# EAGLE board SparkFun_Dev_ESP32_C3_MINI (EAGLE 9.6.2)

Size 17.78 x 33.02 mm. Coordinates in mm from the lower left corner, seen from the top.
Outline: 0,33.02 0,0 17.78,0 17.78,33.02 0,33.02
Copper layers (1+2*15+16): Top 0.035559375mm / dielectric 0.47751875mm / Route2 0.035559375mm / dielectric 0.47751875mm / Route15 0.035559375mm / dielectric 0.47751875mm / Bottom 0.035559375mm
Design rules "SparkFun-4-Layer-General-JLCPCB": minimum track width 7mil, minimum drill 12mil, track to track 7mil, track to pad 7mil, pad to pad 7mil, via to via 7mil, smd to smd 7mil, copper to edge 7mil, drill to drill 7mil, minimum pad ring 7mil, minimum via ring 7mil, stop-mask expansion 3mil, vias tented up to drill 25mil, thermal gap 10mil
Net classes: 1 Power: width 0.127 mm, clearance 0.178 mm
tRestrict: area 17.8,19.6 to 18,19.8
bRestrict: area 8.1,8.1 to 8.4,8.4

## Footprints (pad centres in the part's own frame; a part is rotated, then mirrored left to right if it is on the bottom)
TACTILE_SWITCH_SMD_4.6X2.8MM = smd 0.9 x 1: 1 -2.05,-0.8; 2 2.05,-0.8; 3 2.05,0.8; 4 -2.05,0.8
0402-TIGHT = smd 0.6 x 0.6: 1 -0.5,0; 2 0.5,0
LED-0603 = smd 1 x 1: A -0.877,0; C 0.877,0
FIDUCIAL-MICRO = smd 0.635 x 0.635: 1 0,0
SMT-JUMPER_3_2-NC_TRACE_SILK = smd 0.66 x 1.27: 1 -1.041,0; 2 0,0; 3 1.041,0
USB-C-16P_4LAYER-PADS = smd 0.3 x 1: A5 -1.25,-0.34; A6 -0.25,-0.34; A7 0.25,-0.34; A8 1.25,-0.34; B5 1.75,-0.34; B6 0.75,-0.34; B7 -0.75,-0.34; B8 -1.75,-0.34 | smd 0.6 x 1: GND -3.225,-0.34; GND2 3.225,-0.34; VBUS1 -2.45,-0.34; VBUS2 2.45,-0.34 | drill 0.4 pad 0.6 long: SHLD1 -4.318,-0.915; SHLD2 4.318,-0.915; SHLD3 -4.318,-5.095; SHLD4 4.318,-5.095 | hole 0.65: -2.89,-1.445; 2.89,-1.445
JST04_1MM_VERT = smd 0.6 x 1.55: 1 -1.5,0.775; 2 -0.5,0.775; 3 0.5,0.775; 4 1.5,0.775 | smd 1.2 x 2: NC1 -2.8,3.2; NC2 2.8,3.2
USB-SOLDER-PADS = smd 3 x 0.9: D+ 0,-0.889; D- 0,0.889; GND 0,-2.667; VBUS 0,2.667
SMT-JUMPER_2_NC_TRACE_SILK = smd 0.66 x 1.27: 1 -0.521,0; 2 0.521,0
PAD.03X.05 = smd 1.27 x 1.27: 1 0,0
SOT23-5 = smd 0.55 x 1.2: 1 -0.95,-1.3; 2 0,-1.3; 3 0.95,-1.3; 4 0.95,1.3; 5 -0.95,1.3
ESP32-C3-MINI-1 = smd 0.8 x 0.4: 1 -5.9,4; 2 -5.9,3.2; 3 -5.9,2.4; 4 -5.9,1.6; 5 -5.9,0.8; 6 -5.9,0; 7 -5.9,-0.8; 8 -5.9,-1.6; 9 -5.9,-2.4; 10 -5.9,-3.2; 11 -5.9,-4; 25 5.9,-4; 26 5.9,-3.2; 27 5.9,-2.4; 28 5.9,-1.6; 29 5.9,-0.8; 30 5.9,0; 31 5.9,0.8; 32 5.9,1.6; 33 5.9,2.4; 34 5.9,3.2; 35 5.9,4 | smd 0.4 x 0.8: 12 -4.8,-4.9; 13 -4,-4.9; 14 -3.2,-4.9; 15 -2.4,-4.9; 16 -1.6,-4.9; 17 -0.8,-4.9; 18 0,-4.9; 19 0.8,-4.9; 20 1.6,-4.9; 21 2.4,-4.9; 22 3.2,-4.9; 23 4,-4.9; 24 4.8,-4.9; 36 4.8,4.9; 37 4,4.9; 38 3.2,4.9; 39 2.4,4.9; 40 1.6,4.9; 41 0.8,4.9; 42 0,4.9; 43 -0.8,4.9; 44 -1.6,4.9; 45 -2.4,4.9; 46 -3.2,4.9; 47 -4,4.9; 48 -4.8,4.9 | smd 1.45 x 1.45: 49.1 -1.975,1.975; 49.2 -1.975,0; 49.3 -1.975,-1.975; 49.4 0,-1.975; 49.5 1.975,-1.975; 49.6 1.975,0; 49.7 1.975,1.975; 49.8 0,1.975; 49.9 0,0 | smd 0.7 x 0.7: 50 5.95,4.95; 51 5.95,-4.95; 52 -5.95,-4.95; 53 -5.95,4.95
1X09_CASTELLATED = drill 0.85 pad 1.016: 1 0,0; 2 0,2.54; 3 0,5.08; 4 0,7.62; 5 0,10.16; 6 0,12.7; 7 0,15.24; 8 0,17.78; 9 0,20.32 | drill 1.7 pad 1.75: 1B -1.57,0; 2B -1.57,2.54; 3B -1.57,5.08; 4B -1.57,7.62; 5B -1.57,10.16; 6B -1.57,12.7; 7B -1.57,15.24; 8B -1.57,17.78; 9B -1.57,20.32

## Placement (x,y rotation side)
BOOT  MOMENTARY-SWITCH-SPST-SMD-4.6X2.8MM  [TACTILE_SWITCH_SMD_4.6X2.8MM]  13.97,21.59 90 top
C1  2.2uF  [0402-TIGHT]  11.43,21.59 0 top
C2  2.2uF  [0402-TIGHT]  11.43,20.32 0 top
C5  0.1uF  [0402-TIGHT]  6.35,20.32 0 top
C8  0.1uF  [0402-TIGHT]  16.51,2.54 0 top
C9  10uF  [0402-TIGHT]  16.51,3.81 0 top
D1  RED  [LED-0603]  2.03,31.88 0 top
D2  BLUE  [LED-0603]  16.12,31.75 180 top
FD1  FIDUCIALUFIDUCIAL  [FIDUCIAL-MICRO]  5.08,25.4 0 top
FD2  FIDUCIALUFIDUCIAL  [FIDUCIAL-MICRO]  5.08,25.4 0 bottom
FD3  FIDUCIALUFIDUCIAL  [FIDUCIAL-MICRO]  15.24,12.7 0 top
FD4  FIDUCIALUFIDUCIAL  [FIDUCIAL-MICRO]  15.24,12.7 0 bottom
FRAME2  FRAME-LEDGER  [CREATIVE_COMMONS]  -12.7,-25.4 0 top  (outside the outline)
I2C  JUMPER-SMT_3_2-NC_TRACE_SILK  [SMT-JUMPER_3_2-NC_TRACE_SILK]  8.89,15.24 180 bottom
J1  USB Female Type C Connector  [USB-C-16P_4LAYER-PADS]  8.89,26.67 180 top
J5  Vertical Qwiic Connector  [JST04_1MM_VERT]  8.89,16.51 180 top
JP14  USB_SOLDER_PADS  [USB-SOLDER-PADS]  8.89,31.11 270 bottom
LOGO1  SFE_LOGO_NAME_FLAMEBLANK  [BLANK]  -10.16,-25.4 0 top  (outside the outline)
LOGO2  QWIIC_LOGO_3MM  [QWIIC_3MM]  11.43,6.35 0 top
LOGO3  OSHW-LOGOS  [OSHW-LOGO-S]  5.08,8.89 0 bottom
PWR  JUMPER-SMT_2_NC_TRACE_SILK  [SMT-JUMPER_2_NC_TRACE_SILK]  2.41,31.75 0 bottom
R1  4.7k  [0402-TIGHT]  3.43,30.1 90 top
R2  1k  [0402-TIGHT]  14.73,29.72 90 top
R3  2.2k  [0402-TIGHT]  11.43,17.78 0 top
R4  2.2k  [0402-TIGHT]  6.35,17.78 0 top
R5  5.1k  [0402-TIGHT]  6.35,22.86 0 top
R6  5.1k  [0402-TIGHT]  11.43,22.86 180 top
R7  100k  [0402-TIGHT]  3.81,17.78 180 top
R9  100k  [0402-TIGHT]  13.97,17.78 0 top
R11  100k  [0402-TIGHT]  6.35,21.59 180 top
RESET  MOMENTARY-SWITCH-SPST-SMD-4.6X2.8MM  [TACTILE_SWITCH_SMD_4.6X2.8MM]  3.81,21.59 270 top
SHLD  JUMPER-SMT_2_NC_TRACE_SILK  [SMT-JUMPER_2_NC_TRACE_SILK]  8.89,27.05 270 bottom
STAT  JUMPER-SMT_2_NC_TRACE_SILK  [SMT-JUMPER_2_NC_TRACE_SILK]  15.88,31.75 180 bottom
TP1  TEST-POINT3X5  [PAD.03X.05]  13.97,13.97 0 bottom
TP2  TEST-POINT3X5  [PAD.03X.05]  13.97,11.43 0 bottom
TP3  TEST-POINT3X5  [PAD.03X.05]  13.97,8.89 0 bottom
TP4  TEST-POINT3X5  [PAD.03X.05]  11.43,8.89 0 bottom
TP5  TEST-POINT3X5  [PAD.03X.05]  11.43,11.43 0 bottom
TP6  TEST-POINT3X5  [PAD.03X.05]  11.43,13.97 0 bottom
U2  RT9080-33GJ5  [SOT23-5]  8.89,21.59 180 top
U$1  ESP32-C3_MINI-1  [ESP32-C3-MINI-1]  8.89,5.71 180 top
U$2  1X09_CASTELLATED  [1X09_CASTELLATED]  1.27,8.89 0 top
U$3  1X09_CASTELLATED  [1X09_CASTELLATED]  16.51,29.21 180 top
U$24  [ORDERING_INSTRUCTIONS]  35.56,50.8 0 top  (outside the outline)

## Library data of the parts
BOOT RESET = SparkFun-Switches; PROD_ID: SWCH-15606
C1 C2 = SparkFun-Capacitors; PROD_ID: CAP-14232
C5 = SparkFun-Capacitors; PROD_ID: CAP-14993
C8 = SparkFun-Capacitors; PROD_ID: CAP-12416
C9 = SparkFun-Capacitors; PROD_ID: CAP-14848
D1 = SparkFun-LED; PROD_ID: DIO-17976
D2 = SparkFun-LED; PROD_ID: DIO-08575
FD1-FD4 LOGO1-LOGO3 U$24 = SparkFun-Aesthetics
FRAME2 = SparkFun-Aesthetics; DESIGNER: Elias Santistevan; REV: v01
I2C PWR SHLD STAT = SparkFun-Jumpers
J1 = SparkFun-Connectors; PROD_ID: CONN-14122
J5 = SparkFun-Connectors; PROD_ID: CONN-14483
JP14 TP1-TP6 = SparkFun-Connectors
R1 = SparkFun-Resistors; PROD_ID: RES-15343
R2 = SparkFun-Resistors; PROD_ID: RES-14342
R3 R4 = SparkFun-Resistors; PROD_ID: RES-14341
R5 R6 = SparkFun-Resistors; PROD_ID: RES-14340
R7 R9 R11 = SparkFun-Resistors; PROD_ID: RES-13495
U2 = SparkFun-IC-Power; PROD_ID: VREG-19034
U$1-U$3 = ESP32-C3-MINI-1

## Nets
3.3V: C2.1 C8.1 C9.1 I2C.2 J5.2 PWR.2 R7.2 R9.2 R11.2 U2.5 U$1.3 U$3.4 U$3.4B
EN: C5.1 R11.1 RESET.3 RESET.4 TP5.1 U$1.8 U$3.3 U$3.3B
GND: BOOT.1 BOOT.2 C1.2 C2.2 C5.2 C8.2 C9.2 J1.GND J1.GND2 J5.1 JP14.GND R1.1 R2.1 R5.1 R6.1 RESET.1 RESET.2 SHLD.2 TP2.1 U2.2 U$1.1 U$1.2 U$1.11 U$1.14 U$1.36 U$1.37 U$1.38 U$1.39 U$1.40 U$1.41 U$1.42 U$1.43 U$1.44 U$1.45 U$1.46 U$1.47 U$1.48 U$1.49.1 U$1.49.2 U$1.49.3 U$1.49.4 U$1.49.5 U$1.49.6 U$1.49.7 U$1.49.8 U$1.49.9 U$1.50 U$1.51 U$1.52 U$1.53 U$2.6 U$2.6B U$2.7 U$2.7B U$3.2 U$3.2B
IO5/SCL: J5.4 R4.2 TP6.1 U$1.19 U$2.5 U$2.5B
IO6/SDA: J5.3 R3.1 TP3.1 U$1.20 U$2.4 U$2.4B
IO7/STAT: STAT.2 TP1.1 U$1.21 U$2.3 U$2.3B
IO8: R7.1 U$1.22 U$2.2 U$2.2B
IO9/BOOT: BOOT.3 BOOT.4 U$1.23
IO10: U$1.16 U$2.1 U$2.1B
IO18/USB_N: J1.A7 J1.B7 JP14.D- U$1.26
IO19/USB_P: J1.A6 J1.B6 JP14.D+ U$1.27
IO20/TXO: U$1.30 U$2.9 U$2.9B
IO21/RXI: U$1.31 U$2.8 U$2.8B
IOA0/SCLK: U$1.12 U$3.7 U$3.7B
IOA1/POCI: U$1.13 U$3.6 U$3.6B
IOA2: R9.1 U$1.5 U$3.9 U$3.9B
IOA3/PICO: TP4.1 U$1.6 U$3.5 U$3.5B
IOA4: U$1.18 U$3.8 U$3.8B
N$1: D1.C R1.2
N$2: D1.A PWR.1
N$3: D2.C R2.2
N$4: I2C.3 R3.2
N$5: I2C.1 R4.1
N$7: J1.B5 R5.2
N$8: J1.A5 R6.2
N$11: D2.A STAT.1
SHLD: J1.SHLD1 J1.SHLD2 J1.SHLD3 J1.SHLD4 SHLD.1
V_USB: C1.1 J1.VBUS1 J1.VBUS2 JP14.VBUS U2.1 U2.3 U$3.1 U$3.1B

## Tracks (layer width: path | path; a pad name or v marks a point on that pad's centre or on a via)
3.3V  (12 unrouted)
EN  (7 unrouted)
GND  (55 unrouted)
IO5/SCL  (5 unrouted)
IO6/SDA  (5 unrouted)
IO7/STAT  (4 unrouted)
IO8  (3 unrouted)
IO9/BOOT  (2 unrouted)
IO10  (2 unrouted)
IO18/USB_N  (3 unrouted)
IO19/USB_P  (3 unrouted)
IO20/TXO  (2 unrouted)
IO21/RXI  (2 unrouted)
IOA0/SCLK  (2 unrouted)
IOA1/POCI  (2 unrouted)
IOA2  (3 unrouted)
IOA3/PICO  (3 unrouted)
IOA4  (2 unrouted)
N$1  (1 unrouted)
N$2  (1 unrouted)
N$3  (1 unrouted)
N$4  (1 unrouted)
N$5  (1 unrouted)
N$7  (1 unrouted)
N$8  (1 unrouted)
N$11  (1 unrouted)
SHLD  (4 unrouted)
V_USB  (7 unrouted)

## Text on the board
Route2: 2
Route15: 3
Measures: Units: inches
tDocu: 4-layer / JLC7628 Stackup / Material: TG135-140 / 1oz outer layers / 0.5oz inner layers / Board thickness: 0.8mm / Soldermask: Red / Silkscreen: White / Surface Finish: Lead-Free HASL | Elias Santistevan